# EAGLE board 3x8but_BezelV1.1.1 (EAGLE 6.6.0)

Size 220 x 93 mm. Coordinates in mm from the lower left corner, seen from the top.
Outline: 32,0 78,0 78,7.5 87,7.5 87,0 133,0 133,7.5 142,7.5 142,0 188,0 188,7.5 197,7.5 197,0 220,0 220,93 197,93 197,85.5 188,85.5 188,93 142,93 142,85.5 133,85.5 133,93 87,93 87,85.5 78,85.5 78,93 32,93 32,85.5 23,85.5 23,93 0,93 0,0 23,0 23,7.5 32,7.5 32,0
Copper layers (1*16): Top 0.035mm / dielectric 1.5mm / Bottom 0.035mm
Design rules "default": minimum track width 10mil, minimum drill 24mil, track to track 8mil, track to pad 8mil, pad to pad 8mil, via to via 8mil, smd to smd 8mil, copper to edge 40mil, drill to drill 8mil, minimum pad ring 10mil, minimum via ring 8mil, stop-mask expansion 4mil, vias tented up to drill 0mil, thermal gap 10mil
Holes 3 mm at 10,89 60,89 110,89 160,89 210,89 210,4 160,4 110,4 60,4 10,4

## Footprints (pad centres in the part's own frame; a part is rotated, then mirrored left to right if it is on the bottom)
3X8BEZEL = hole 3: 3.434,47.516; 105.966,47.516; 113.434,47.516; 215.966,47.516; 3.434,2.516; 215.934,52.516; 215.934,2.516; 113.434,2.516; 105.934,2.516; 105.934,52.516; 113.434,52.516; 50.934,52.516; 58.434,52.516; 58.434,47.516; 50.934,47.516; 50.934,2.516; 58.434,2.516; 160.934,52.516; 168.434,52.516; 168.434,47.516; 160.934,47.516; 160.934,2.516; 168.434,2.516; 3.434,52.516

## Placement (x,y rotation side)
E$1  [3X8BEZEL]  0,7.5 0 top

## Library data of the parts
E$1 = Rubberbutton